# Altium PCB Esperto_Watch_V3.PcbDoc
Units mm, origin at the board's own origin, x right, y up, seen from the top; angles counter-clockwise.
Board outline 30 x 30 mm, 4 copper layers (TOP, POWER, GND, BOTTOM), stack 0.777 mm thick; 69 components, 62 nets, 344 pads, 146 vias.
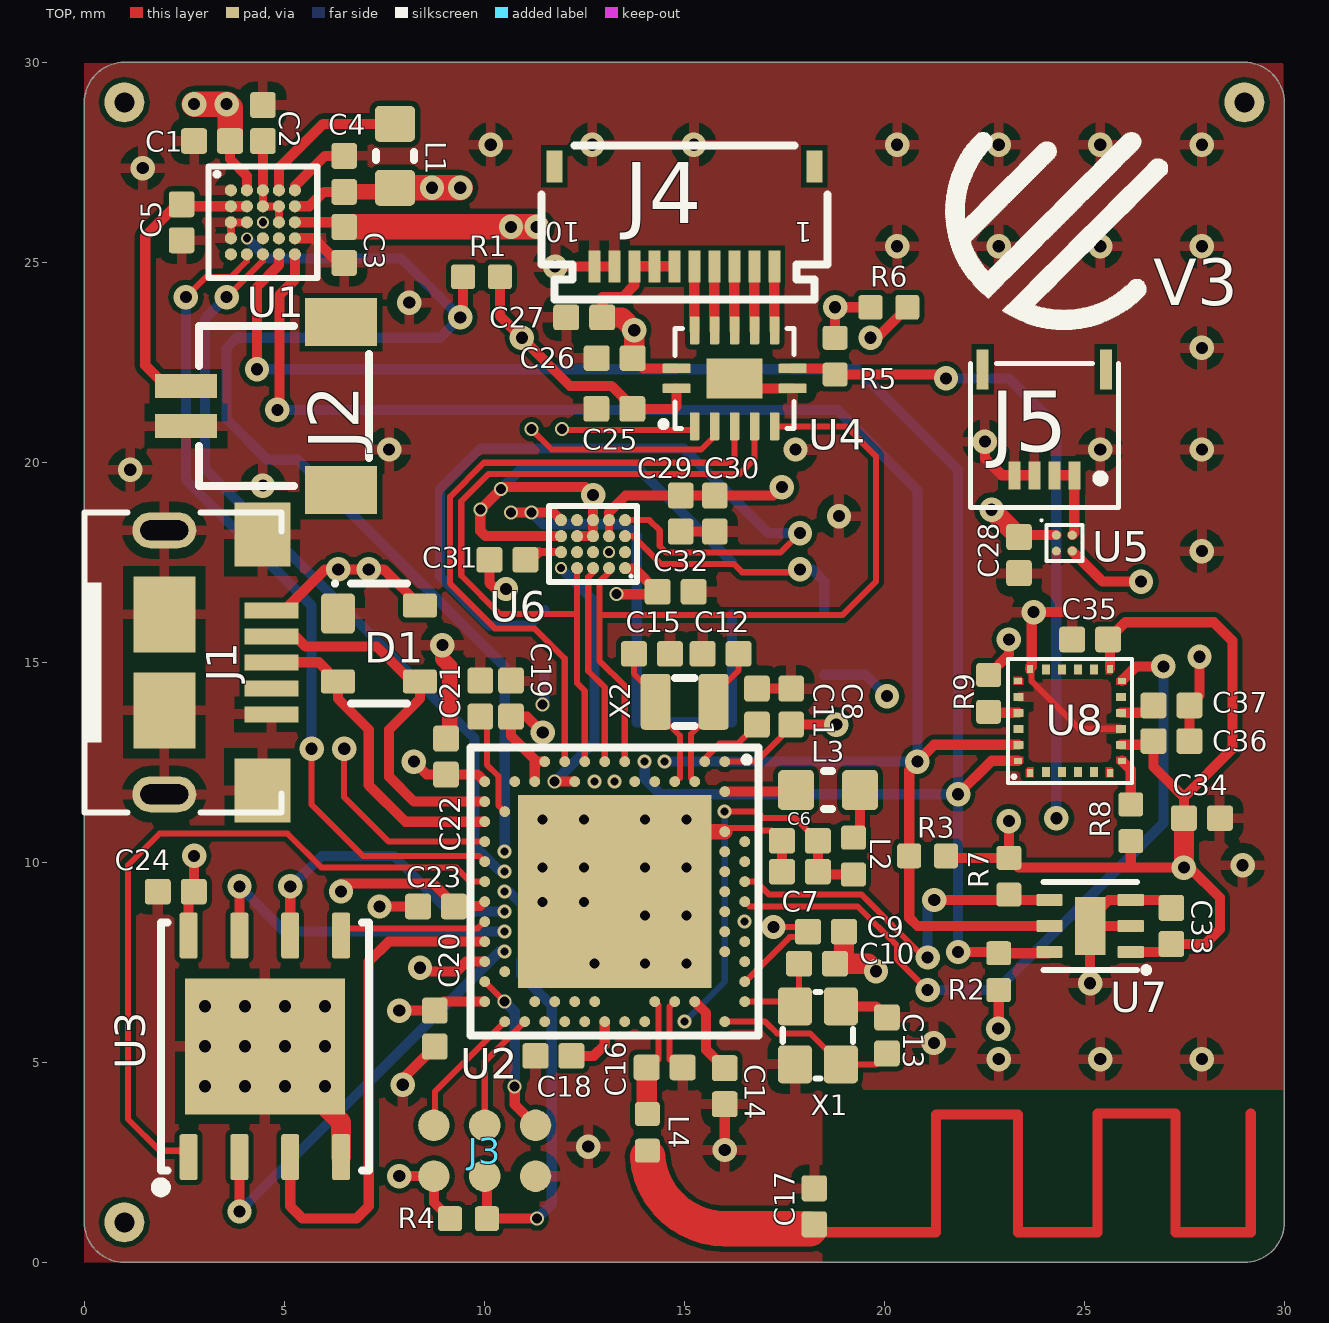
[diagram p0: TOP view]
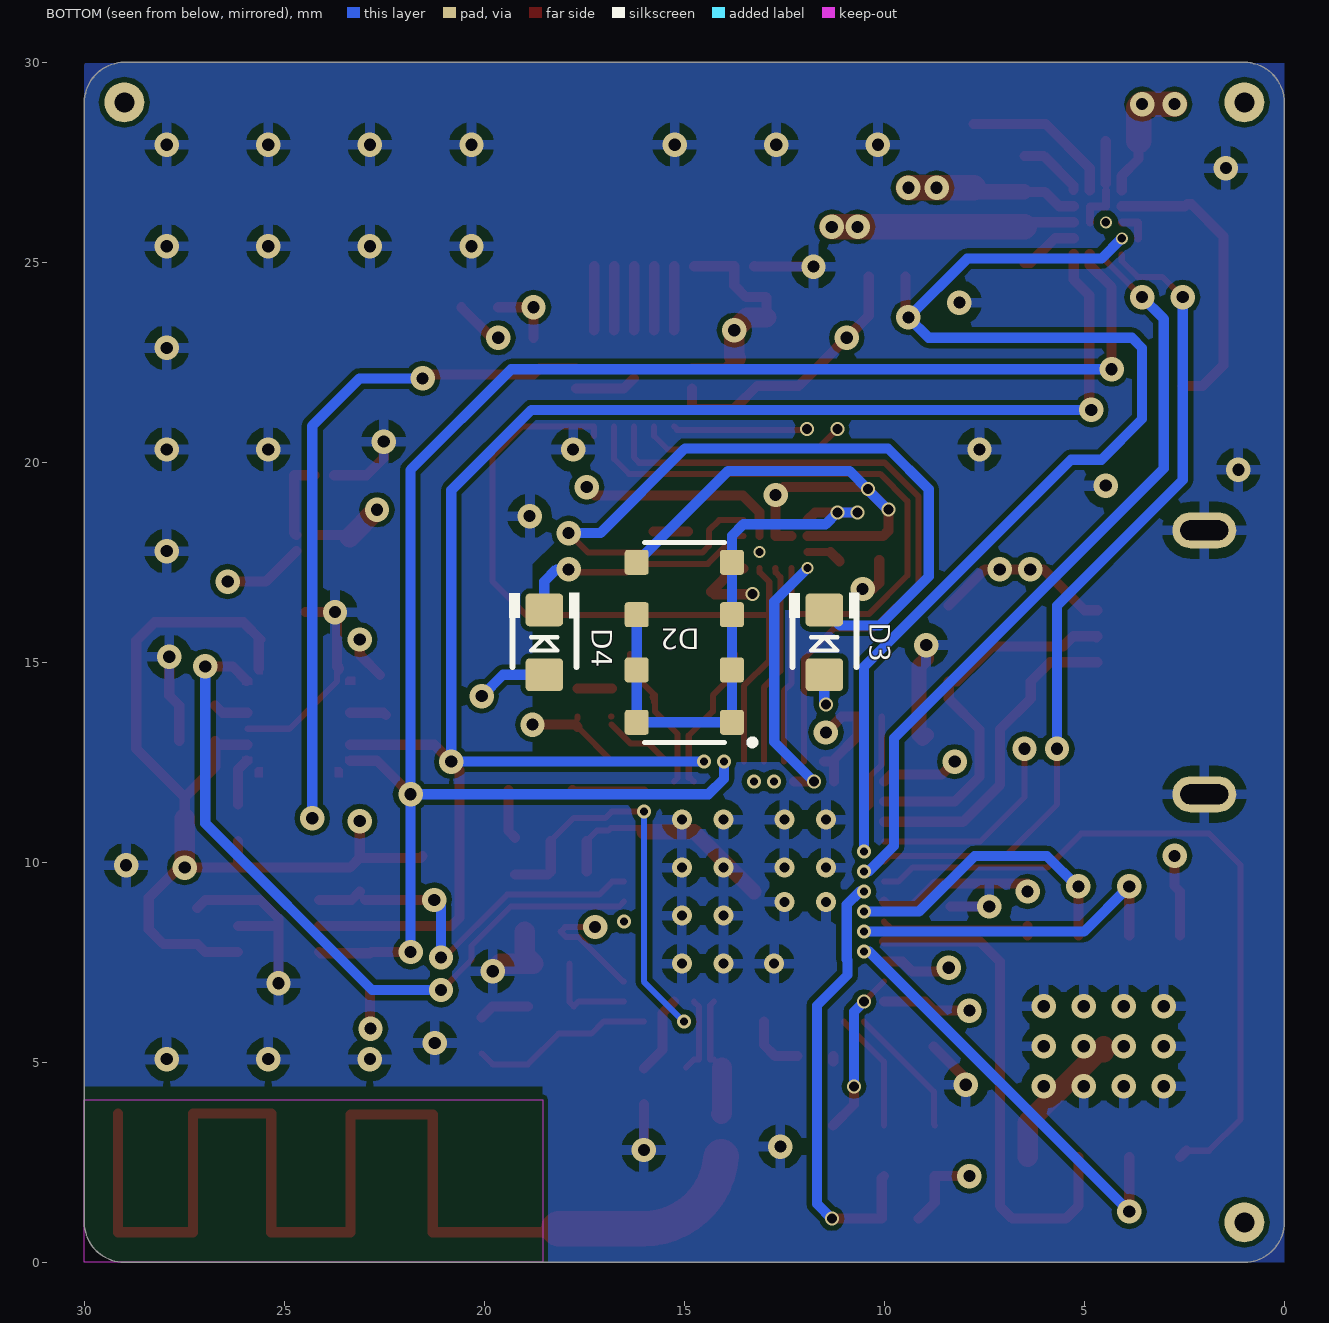
[diagram p1: BOTTOM view, seen from below]
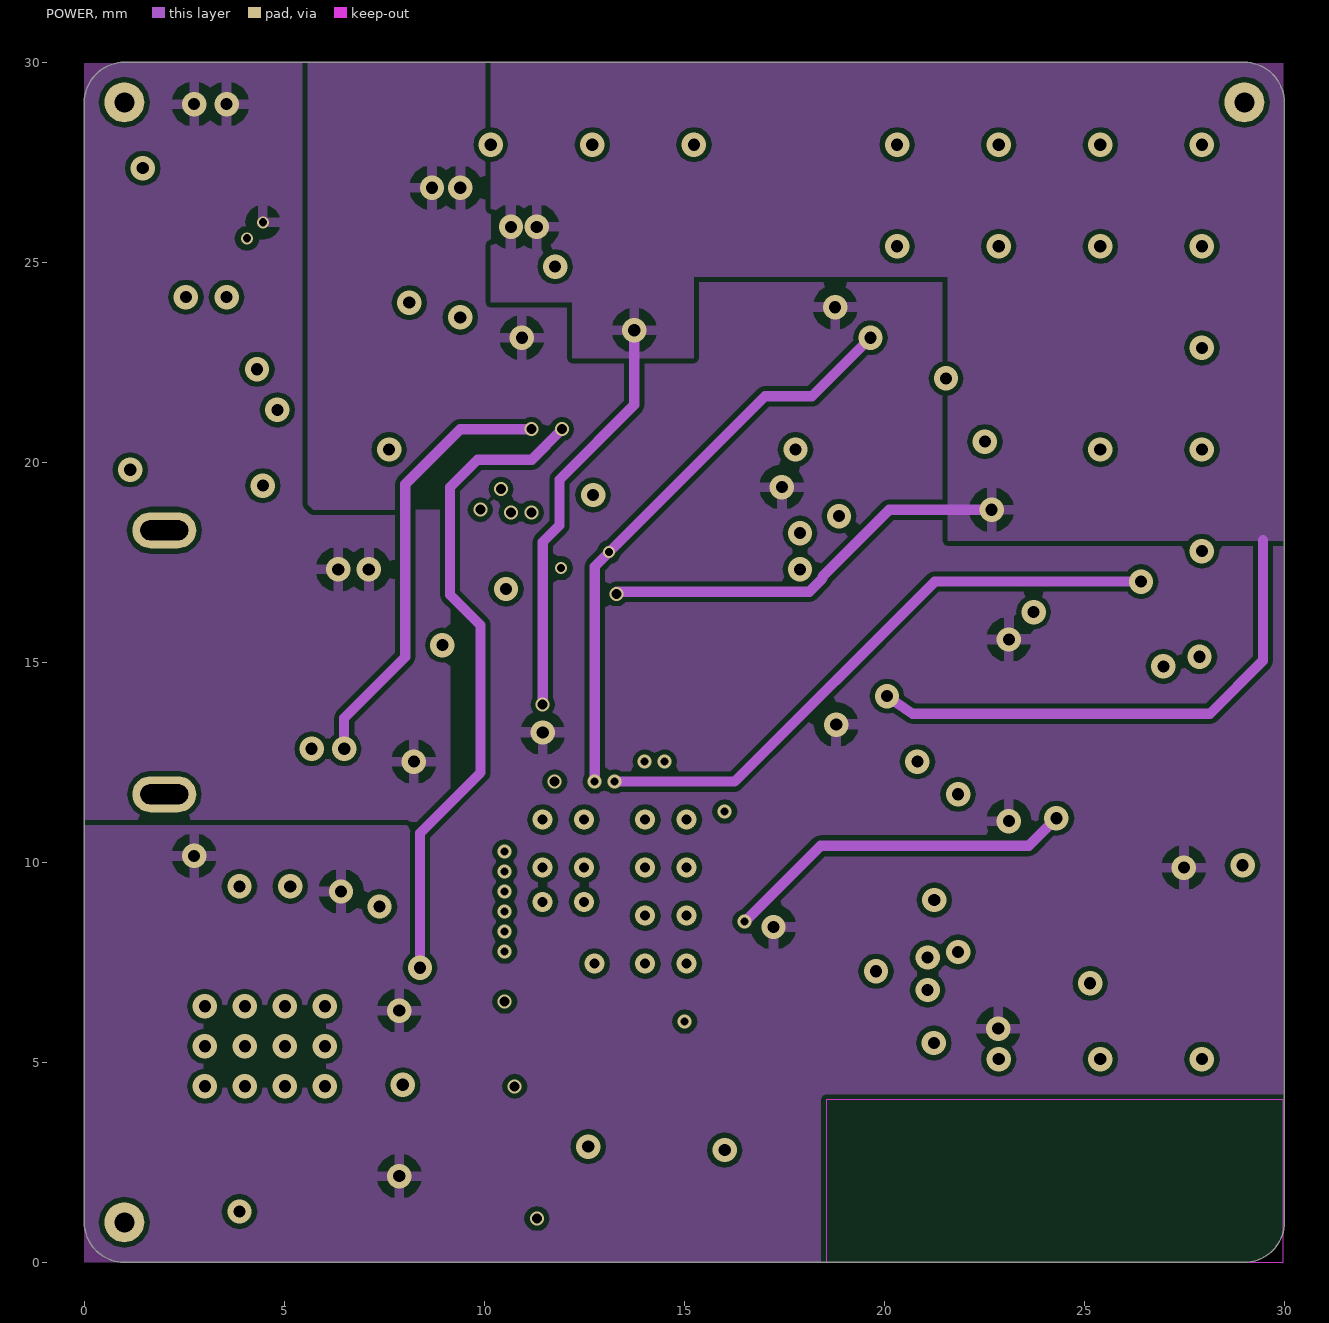
[diagram p2: POWER]
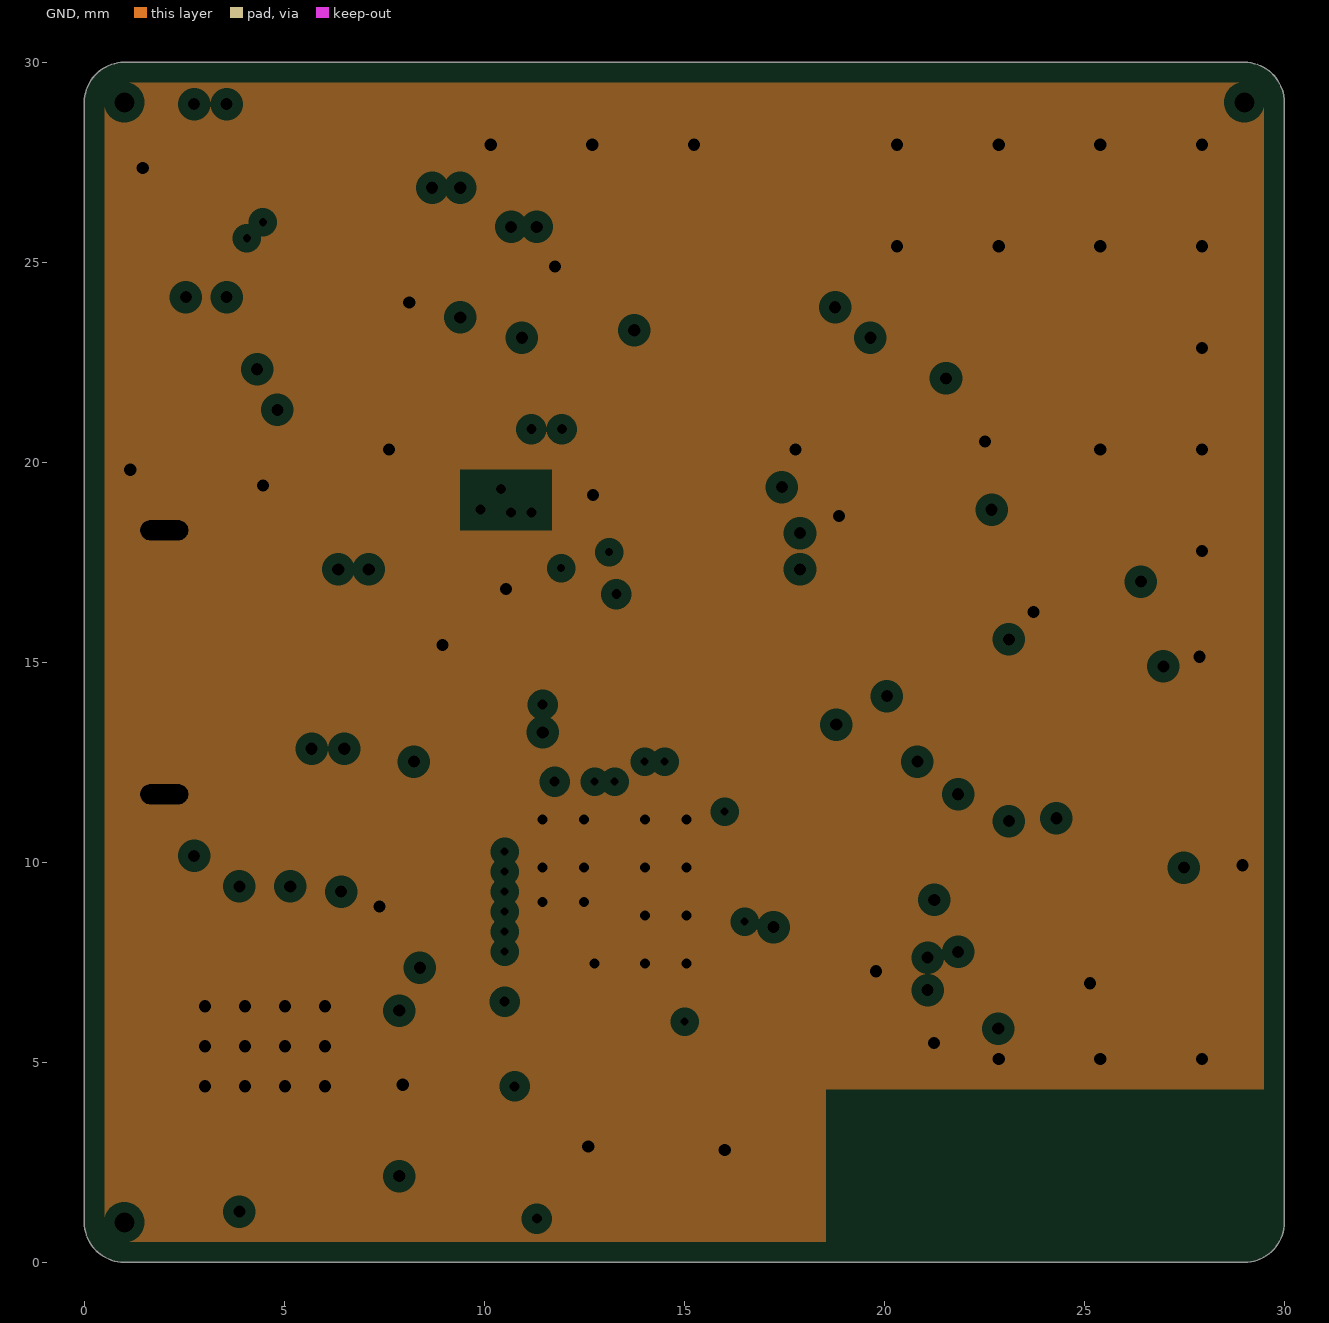
[diagram p3: GND, clearances drawn from the general rule]

## Layer stack, top to bottom
Top Solder: solder mask 0.0102, Solder Resist, Dk 3.5
TOP: signal copper 0.0356
Dielectric 1: core 0.254, FR-4, Dk 4.2
POWER: signal copper 0.0356
Dielectric 4: prepreg 0.127, Dk 4.2
GND: plane copper 0.0356, net GND
Dielectric 2: core 0.254, FR-4, Dk 4.2
BOTTOM: signal copper 0.0356
Bottom Solder: solder mask 0.0102, Solder Resist, Dk 3.5

## Board outline
0,1 0,29 cw(c1,29) 1,30 29,30 cw(c29,29) 30,29 30,1 cw(c29,1) 29,0 1,0 cw(c1,1)

## Design rules (kind name [scope] priority, off if disabled: settings)
Clearance [All] p1: gap=0.127 ignorepadtopadclearanceinfootprint=TRUE except(0: Arc-SMDPad Arc-Text Track-SMDPad Track-Text SMDPad-SMDPad SMDPad-Via SMDPad-Text SMDPad-Hole THPad-Text Via-Text Fill-Text Poly-Text Region-Text Text-Text Text-Hole)
DiffPairsRouting [All] p1: maxlimit=0.254 minlimit=0.254 mostfreqgap=0.254 toplayer_minwidth=0.127 toplayer_maxwidth=0.381 toplayer_prefwidth=0.254 midlayer1_minwidth=0.381 midlayer1_maxwidth=0.381 midlayer1_prefwidth=0.381 bottomlayer_minwidth=0.127 bottomlayer_maxwidth=0.381 bottomlayer_prefwidth=0.254 maxuncoupledlength=12.7
MinimumSolderMaskSliver [All] p1: minsoldermaskwidth=0
PlaneClearance [All] p1: clearance=0.254
PlaneConnect [All] p1: planeconnectstyle=Relief reliefexpansion=0.127 reliefentries=4 reliefconductorwidth=0.127 reliefairgap=0.127
PolygonConnect [All] p1: connectstyle=Relief reliefconductorwidth=0.254 reliefentries=4 polygonreliefangle="90 Angle" airgapwidth=0.254
RoutingVias [All] p1: holewidth=0.381 width=1.27 viastyle="Through Hole" minholewidth=0.203 minwidth=0.254 maxholewidth=0.762 maxwidth=0.635
SilkToSilkClearance [All] p1: silktosilkclearance=0
SilkToSolderMaskClearance [IsPad] p1: minsilkscreentomaskgap=0 clearancetoexposedcopper=TRUE
SolderMaskExpansion [All] p1: expansion=0.102
Width [All] p1: maxlimit=1.27 minlimit=0.152 preferedwidth=0.254 minimp=50.000000 maximp=50.000000 favimp=50.000000
24 further rules are at their usual default settings.

## Classes and differential pairs
differential pair USB_D: +USB_D_P -USB_D_N

## Components (designator, comment, footprint, x,y, rotation, side; value= is the part's Value field where it differs from the comment)
C1 "1uF" CC_1005_0402_N 3.194,28.032 r0 top
C2 "4.7uF" CC_1005_0402_N 4.464,28.482 r270 top
C3 "1uF" CC_1005_0402_N 6.496,25.436 r90 top
C4 "10uF" CC_1005_0402_N 6.496,27.212 r270 top
C5 "1uF" CC_1005_0402_N 2.432,26 r90 top
C6 "1uF" CC_1005_0402_N 17.89,10.537 r0 top
C7 "47nF" CC_1005_0402_N 17.89,9.767 r0 top
C8 "1uF" CC_1005_0402_N 17.671,13.894 r270 top
C9 "100nF" CC_1005_0402_N 18.542,8.267 r180 top
C10 "12pF" CC_1005_0402_N 18.32,7.467 r0 top
C11 "100nF" CC_1005_0402_N 16.816,13.894 r270 top
C12 "12pF" CC_1005_0402_N 15.907,15.212 r0 top
C13 "12pF" CC_1005_0402_N 20.066,5.674 r90 top
C14 "100pF" CC_1005_0402_N 16.01,4.402 r270 top
C15 "12pF" CC_1005_0402_N 14.19,15.212 r180 top
C16 "1pF" CC_1005_0402_N 14.51,4.87 r180 top
C17 "1pF" CC_1005_0402_N 18.25,1.4 r270 top
C18 "820pF" CC_1005_0402_N 11.729,5.161 r0 top
C19 "4.7uF" CC_1005_0402_N 10.668,14.093 r270 top
C20 "100nF" CC_1005_0402_N 8.762,5.842 r90 top
C21 "4.7uF" CC_1005_0402_N 9.899,14.093 r270 top
C22 "4.7uF" CC_1005_0402_N 9.042,12.645 r270 top
C23 "100nF" CC_1005_0402_N 8.794,8.895 r0 top
C24 "100nF" CC_1005_0402_N 2.286,9.266 r0 top
C25 "100nF" CC_1005_0402_N 13.25,21.336 r0 top
C26 "100nF" CC_1005_0402_N 13.26,22.606 r0 top
C27 "1uF" CC_1005_0402_N 12.498,23.622 r0 top
C28 "100nF" CC_1005_0402_N 23.368,17.681 r90 top
C29 "10uF" CC_1005_0402_N 14.91,18.72 r90 top
C30 "100nF" CC_1005_0402_N 15.763,18.72 r90 top
C31 "1uF" CC_1005_0402_N 10.577,17.562 r0 top
C32 "10uF" CC_1005_0402_N 14.783,16.764 r180 top
C33 "1uF" CC_1005_0402_N 27.177,8.408 r270 top
C34 "1uF" CC_1005_0402_N 27.94,11.104 r180 top
C35 "100nF" CC_1005_0402_N 25.146,15.571 r0 top
C36 "100nF" CC_1005_0402_N 27.178,13.031 r180 top
C37 "470nF" CC_1005_0402_N 27.178,13.92 r180 top
D1 "PRTR5V0U2X" PRTR5V0U2X 7.366,15.469 r0 top
D2 "VEMD8080" VEMD8080 15,15.5 r0 bottom
D3 "VLMTG1400" LED_GREEN_0603 11.5,15.5 r270 bottom
D4 "VLMTG1400" LED_GREEN_0603 18.5,15.5 r270 bottom
J1 "10118193-0001LF" CONN_USB_MICRO_B 4.675,15 r0 top locked value=MicroUSB-B
J2 "SM02B-SRSS-TB" SM02B-SRSS-TB 2.541,21.404 r90 top value="HDR-2, 1mm"
J3 "TC2030" CONN_TC2030 10.01,2.789 r0 top
J4 "687110182122" 687110182122 15,26 r180 top
J5 "503480-0400" 503480-0400 24,21 r180 top
L1 "2.2uH" IND_1608_0603_N 7.766,27.662 r270 top
L2 "15nH" RC_1005_0402_N 19.229,10.156 r270 top
L3 "10uH" IND_1608_0603_N 18.594,11.807 r0 top
L4 "3.9nH" RC_1005_0402_N 14.076,3.249 r270 top
R1 "100k" RC_1005_0402_N 9.929,24.638 r0 top
R2 "4.7k" RC_1005_0402_N 22.86,7.267 r270 top
R3 "4.7k" RC_1005_0402_N 21.082,10.16 r0 top
R4 "100k" RC_1005_0402_N 9.604,1.092 r180 top
R5 "100k" RC_1005_0402_N 18.77,22.654 r90 top
R6 "100k" RC_1005_0402_N 20.114,23.876 r180 top
R7 "100k" RC_1005_0402_N 23.114,9.652 r90 top
R8 "4.7k" RC_1005_0402_N 26.162,10.988 r90 top
R9 "4.7k" RC_1005_0402_N 22.606,14.224 r270 top
U1 "BQ25120A" BQ25120A 4.464,26 r0 top value=Value
U2 "nRF52840-QIAA" nRF52840 13.26,9.267 r270 top
U3 "MX25R6435F" MX25R6435FZNIL0 4.513,5.401 r90 top
U4 "FXL5T244BQX" FXL5T244BQX 16.256,22.098 r0 top
U5 "LP5560" LP5560 24.5,17.98 r0 top value=Value
U6 "MAX86140" MAX86140 12.719,17.955 r180 top value=Value
U7 "MAX44009" MAX44009 25.145,8.408 r180 top value=Value
U8 "BHI160" BHI160 24.638,13.539 r90 top
X1 "32MHz" XTAL_32M 18.34,5.674 r90 top
X2 "32.768kHz" XTAL_32K768 15.01,14.014 r0 top

## Footprints (in the part's own frame and the unit in brackets; to place one, negate y for a bottom-side part, rotate by r counter-clockwise, add the part's x,y. Pads: shape width x height; smd on the part's side, far side on the other; paste and mask are expansions set on the pad)
503480-0400 [mm]
  rect 0.3x0.7 smd: 1(-0.75,1.325) 2(-0.25,1.325) 3(0.25,1.325) 4(0.75,1.325)
  rect 0.3x1 smd: S1(-1.54,-1.325) S2(1.54,-1.325)
  silkscreen extent -1.85,-1.48 1.85,2.12, body extent -1.85,-1.9 1.85,1.7, height 1.88
687110182122 [mm] "ZIF Connectors, Horizontal, Dual Contact Back Locking, pitch 0.5mm, 10p"
  rect 0.3x0.8 smd: 1(-2.25,1.1) 2(-1.75,1.1) 3(-1.25,1.1) 4(-0.75,1.1) 5(-0.25,1.1) 6(0.25,1.1) 7(0.75,1.1) 8(1.25,1.1) 9(1.75,1.1) 10(2.25,1.1)
  rect 0.4x0.8 smd: MP1(-3.25,-1.4) MP2(3.25,-1.4)
  silkscreen extent -3.57,-1.92 3.58,1.92, body extent -3.5,-1.85 3.5,1.85, height 0.98
BHI160 [mm]
  rect 0.2x0.15 smd mask+0: 1(-1.3,1) 6(-1.3,-1) 13(1.3,-1) 18(1.3,1)
  rect 0.25x0.2 smd mask+0.05: 2(-1.285,0.6) 3(-1.285,0.2) 4(-1.285,-0.2) 5(-1.285,-0.6) 14(1.285,-0.6) 15(1.285,-0.2) 16(1.285,0.2) 17(1.285,0.6)
  rect 0.15x0.2 smd mask+0: 7(-1,-1.3) 12(1,-1.3) 19(1,1.3) 24(-1,1.3)
  rect 0.2x0.25 smd mask+0.05: 8(-0.6,-1.285) 9(-0.2,-1.285) 10(0.2,-1.285) 11(0.6,-1.285) 20(0.6,1.285) 21(0.2,1.285) 22(-0.2,1.285) 23(-0.6,1.285)
  TOP region: 1.1,-1.41 0.9,-1.41 0.9,-1.16 1.05,-1.16 1.1,-1.21
  TOP region: -1.1,-1.41 -0.9,-1.41 -0.9,-1.16 -1.05,-1.16 -1.1,-1.21
  TOP region: -1.1,1.41 -0.9,1.41 -0.9,1.16 -1.05,1.16 -1.1,1.21
  TOP region: 1.1,1.41 0.9,1.41 0.9,1.16 1.05,1.16 1.1,1.21
  TOP region: 1.41,-1.1 1.41,-0.9 1.16,-0.9 1.16,-1.05 1.21,-1.1
  TOP region: 1.41,1.1 1.41,0.9 1.16,0.9 1.16,1.05 1.21,1.1
  TOP region: -1.41,-1.1 -1.41,-0.9 -1.16,-0.9 -1.16,-1.05 -1.21,-1.1
  TOP region: -1.41,1.1 -1.41,0.9 -1.16,0.9 -1.16,1.05 -1.21,1.1
  silkscreen extent -1.55,-1.55 1.55,1.55, body extent -1.5,-1.5 1.5,1.5, height 1.01
BQ25120A [mil]
  round 12 smd mask+1.57: A1(-31.5,31.5)
  round 12 smd paste+0 mask+1.57: A2(-15.75,31.5) A3(0,31.5) A4(15.75,31.5) A5(31.5,31.5) B1(-31.5,15.75) B2(-15.75,15.75) B3(0,15.75) B4(15.75,15.75) B5(31.5,15.75) C1(-31.5,0) C2(-15.75,0) C3(0,0) C4(15.75,0) C5(31.5,0) D1(-31.5,-15.75) D3(0,-15.75) D4(15.75,-15.75) D5(31.5,-15.75) E1(-31.5,-31.5) E2(-15.75,-31.5) E3(0,-31.5) E4(15.75,-31.5) E5(31.5,-31.5)
  round 5.91 smd paste+0 mask+1.57: D2(-15.75,-15.75)
  silkscreen extent -54,-55 54,55, body extent -48,-50 49,50, height 20
CC_1005_0402_N [mm] "Chip Capacitor, 2-Leads, Body 1.0x0.5mm, IPC Medium Density"
  rrect25% 0.65x0.64 smd paste+0 mask+0.064: 1(-0.45,0) 2(0.45,0)
  body extent -0.55,-0.25 0.55,0.25, height 0.56
CONN_TC2030 [mil]
  round 31 smd paste-3937.01 mask+2.5: 1(-50,-25) 2(-50,25) 3(0,-25) 4(0,25) 5(50,-25) 6(50,25)
CONN_USB_MICRO_B [mm]
  rect 1.35x0.4 smd: 1(0,1.3) 2(0,0.65) 3(0,0) 4(0,-0.65) 5(0,-1.3)
  oval 1.6x0.9 hole 0.5 slot 1.2 at 0 deg: 6(-2.675,-3.3) 6(-2.675,3.3)
  oval 2x1.5 on Top Paste: 6(-2.675,-3.3) 6(-2.675,3.3)
  rect 1.55x1.9 smd: 6(-2.675,-1.2) 6(-2.675,1.2)
  rect 1.4x1.6 smd: 6(-0.225,-3.2) 6(-0.225,3.2)
  silkscreen extent -4.75,-3.75 0.25,3.75, body extent -5.28,-4.1 0.15,4.1, height 2.72
FXL5T244BQX [mm]
  rrect25% 0.7x0.24 smd: 1(-1.45,-0.25) 7(1.45,-0.25) 8(1.45,0.25) 14(-1.45,0.25)
  rrect25% 0.24x0.7 smd: 2(-1,-1.2) 3(-0.5,-1.2) 4(0,-1.2) 5(0.5,-1.2) 6(1,-1.2) 9(1,1.2) 10(0.5,1.2) 11(0,1.2) 12(-0.5,1.2) 13(-1,1.2)
  rect 1.4x1 smd: EPAD(0,0)
  silkscreen extent -1.83,-1.25 1.49,1.25, body extent -1.5,-1.25 1.5,1.25, height 0.75
IND_1608_0603_N [mm] "Chip Resistor, 2-Leads, Body 1.5x0.8mm, IPC Medium Density"
  rrect25% 0.9x1 smd paste+0 mask+0.064: 1(-0.8,0) 2(0.8,0)
  silkscreen extent -0.1,-0.48 0.1,0.48, body extent -0.85,-0.48 0.85,0.48, height 0.55
LED_GREEN_0603 [mm] "LED,Chip;1.60mm L X 0.80mm W X 0.45mm H"
  rrect25% 0.82x0.94 smd mask+0.064: A(0.81,0) K(-0.81,0)
  silkscreen extent -1.24,-0.88 0.61,0.88, body extent -0.8,-0.4 0.8,0.4, height 0.45
LP5560 [mm]
  round 0.229 smd mask+0.051: A1(-0.2,0.2) A2(0.2,0.2) B1(-0.2,-0.2) B2(0.2,-0.2)
  silkscreen extent -0.6,-0.45 0.45,0.6, body extent -0.51,-0.51 0.51,0.51, height 0.6
MAX44009 [mil]
  rrect25% 26x12 smd paste+0 mask+2.5: 1(-40,25.59) 2(-40,0) 3(-40,-25.59) 4(40,-25.59) 5(40,0) 6(40,25.59)
  rect 30x57 smd paste-28 mask+2.5: 7(0,0)
  silkscreen extent -58,-43 46,46, body extent -41,-41 41,41, height 26
MAX86140 [mil]
  round 12 smd paste+0 mask+1.57: A1(-31.5,23.62) A2(-15.75,23.62) A3(0,23.62) A4(15.75,23.62) A5(31.5,23.62) B1(-31.5,7.87) B2(-15.75,7.87) B3(0,7.87) B4(15.75,7.87) B5(31.5,7.87) C1(-31.5,-7.87) C2(-15.75,-7.87) C3(0,-7.87) C4(15.75,-7.87) C5(31.5,-7.87) D1(-31.5,-23.62) D2(-15.75,-23.62) D3(0,-23.62) D4(15.75,-23.62) D5(31.5,-23.62)
  silkscreen extent -43,-37 43,37, body extent -41,-36 41,37, height 20
MX25R6435FZNIL0 [mm]
  rrect25% 1.15x0.45 smd: 1(-2.77,1.905) 2(-2.77,0.635) 3(-2.77,-0.635) 4(-2.77,-1.905) 5(2.77,-1.905) 6(2.77,-0.635) 7(2.77,0.635) 8(2.77,1.905)
  rect 3.4x4 smd paste-1.7: 4(0,0)
  silkscreen extent -3.65,-2.6 3.1,2.72, body extent -3.05,-2.55 3.05,2.55, height 0.8
nRF52840 [mm]
  rect 4.83x4.83 smd mask+0.05: 74(0,0)
  round 0.275 smd paste+0.012 mask+0.05: A8(-1.25,3.25) A10(-0.75,3.25) A12(-0.25,3.25) A14(0.25,3.25) A16(0.75,3.25) A18(1.25,3.25) A20(1.75,3.25) A22(2.25,3.25) A23(2.75,3.25) AA24(3.25,-2.25) AB2(-2.75,-2.5) AC5(-2,-2.75) AC9(-1,-2.75) AC11(-0.5,-2.75) AC13(0,-2.75) AC15(0.5,-2.75) AC17(1,-2.75) AC19(1.5,-2.75) AC21(2,-2.75) AC24(3.25,-2.75) AD2(-2.75,-3.25) AD4(-2.25,-3.25) AD6(-1.75,-3.25) AD8(-1.25,-3.25) AD10(-0.75,-3.25) AD12(-0.25,-3.25) AD14(0.25,-3.25) AD16(0.75,-3.25) AD18(1.25,-3.25) AD20(1.75,-3.25) AD22(2.25,-3.25) AD23(2.75,-3.25) B1(-3.25,2.75) B3(-2.5,2.75) B5(-2,2.75) B7(-1.5,2.75) B9(-1,2.75) B11(-0.5,2.75) B13(0,2.75) B15(0.5,2.75) B17(1,2.75) B19(1.5,2.75) B24(3.25,2.75) C1(-3.25,2.25) D2(-2.75,2) D23(2.75,2) E24(3.25,1.75) F2(-2.75,1.5) F23(2.75,1.5) G1(-3.25,1.25) H2(-2.75,1) H23(2.75,1) J1(-3.25,0.75) J24(3.25,0.75) K2(-2.75,0.5) L1(-3.25,0.25) L24(3.25,0.25) M2(-2.75,0) N1(-3.25,-0.25) N24(3.25,-0.25) P2(-2.75,-0.5) P23(2.75,-0.5) R1(-3.25,-0.75) R24(3.25,-0.75) T2(-2.75,-1) T23(2.75,-1) U1(-3.25,-1.25) U24(3.25,-1.25) V23(2.75,-1.5) W1(-3.25,-1.75) W24(3.25,-1.75) Y2(-2.75,-2) Y23(2.75,-2)
  silkscreen extent -3.6,-3.6 3.6,3.6, body extent -3.55,-3.55 3.55,3.55, height 0.85
PRTR5V0U2X [mm]
  rrect25% 0.85x1 smd: 1(-1.025,0.75)
  rrect25% 0.85x0.6 smd: 2(-1.025,-0.95) 3(1.025,-0.95) 4(1.025,0.95)
  silkscreen extent -1.15,-1.5 0.7,1.55, body extent -1.21,-1.46 1.21,1.46, height 1
RC_1005_0402_N [mm] "Chip Resistor, 2-Leads, Body 1.0x0.5mm, IPC Medium Density"
  rrect25% 0.6x0.62 smd paste+0 mask+0.064: 1(-0.46,0) 2(0.46,0)
  body extent -0.55,-0.25 0.55,0.25, height 0.4
SM02B-SRSS-TB [mm]
  rect 1.2x1.8 smd: 0(-2.1,-3.875) 0(2.1,-3.875)
  rect 0.6x1.55 smd: 1(-0.5,0) 2(0.5,0)
  silkscreen extent -2,-4.57 2,-0.33, body extent -1.99,-4.58 1.99,0.41, height 3
VEMD8080 [mm]
  rrect25% 0.6x0.625 smd mask+0.064: A(1.19,-2) K(-1.19,-2) K(-1.19,-0.69) K(-1.19,0.69) K(-1.19,2) K(1.19,-0.69) K(1.19,0.69) K(1.19,2)
  silkscreen extent -1.75,-2.5 1,2.55, body extent -1.25,-2.4 1.25,2.4, height 0.48
XTAL_32K768 [mm]
  rrect25% 0.75x1.4 smd: 1(-0.725,0) 2(0.725,0)
  silkscreen extent -0.24,-0.6 0.24,0.6, body extent -1,-0.61 1,0.61, height 0.6
XTAL_32M [mm]
  rrect25% 0.95x0.85 smd: 1(-0.725,-0.575) 2(0.725,-0.575) 3(0.725,0.575) 4(-0.725,0.575)
  silkscreen extent -1.08,-0.88 1.08,0.88, body extent -1.05,-0.85 1.05,0.85, height 0.56

## Part data
C1 C2 C3 C4 C5 C6 C7 C8 C9 C10 C11 C12 C13 C14 C15 C16 C17 C18 C19 C20 C21 C22 C23 C24 C25 C26 C27 C28 C29 C30 C31 C32 C33 C34 C35 C36 C37: library part Capacitor, "Capacitor"
D1: "Ultra low capacitance double rail-to-rail ESD protection diode", 2nd source part number=152-4157, Manufacturer=NXP, Supplier part number=568-4140-1-ND, 2nd source Supplier=Farnell, Artikkelnr Noca=10069015, Artikkelnr Simpro=N.A., Datasheet=http://www.farnell.com/datasheets/109718.pdf, Footprint Doc=SOT-143B, LatestRevisionDate=2012-06-11, Manufacturer Part Number=PRTR5V0U2X, Part Number=PRTR5V0U2X, Published=2012-06-11, Publisher="Nordic Semiconductor", Supplier=Digi-Key
D2: library part Photodiode, "Photodiode"
D3 D4: library part LED, "Single LED"
J1: "MicroUSB-B-SMT", 2nd source part number=609-4616-1-ND, Manufacturer="Allen Creations Corp.", Manufacturer Part Number=AJU55-BS2111-L, Part Number=USB-Micro-B-RA-SMD-PiP, Part number IPS=00000007790, 2nd source Supplier=Digi-Key, Artikkelnr Noca=55029020, Artikkelnr Simpro=N.A., Datasheet="\\hizz\pro\app9717\Datasheet\connectores\Allen Creations Corp\AJU-211.pdf", Footprint Doc=USB-Micro-B-RA-SMD-PiP, LatestRevisionDate=2016-04-21, Pin Count=5, Published=2014-10-07, Publisher="Nordic Semiconductor", Supplier=Cabcon, Supplier part number=AJU55-BS2111-L
J2: "1.0mm pitch connector side entry SMD", Manufacturer=JST, Manufacturer Part Number=SM02B-SRSS-TB(LF)(SN), Part number IPS=00000007791, Supplier part number=455-1802-1-ND, Artikkelnr Noca=55010030, Artikkelnr Simpro=N.A., Datasheet=http://www.jst-mfg.com/product/pdf/eng/eSH.pdf, Footprint Doc=SM02B-SRSS-TB, LatestRevisionDate=2016-06-20, Note="JST, Header", Part Number=SM02B-SRSS-TB, Pin Count=2, Published=2016-06-20, Publisher="Nordic Semiconductor", Supplier=Digi-Key
J4: "SMT ZIF Connectors WR-FPC, Horizontal, Back Locking Dual Contact, pitch 0.5 mm, 10 pins", Contact Resistance="30 mOhm", Operating Temperature="-55 to 85 degC", Rated Current="0.5 A", Withstanding Voltage="250 VAC", Working Voltage="50 VAC", ComponentLink1Description=Manufacturer, ComponentLink1URL=http://www.we-online.de, ComponentLink2Description=Datasheet, ComponentLink2URL=https://katalog.we-online.de/em/datasheet/687110182122.pdf, Contact Design="Back Locking Dual Contact", Mounting Technology=SMT, Orientation=Horizontal, Packaging="Tape and Reel", Part Number=687110182122, Pin Number=10, Pitch="0.5 mm", Published Date="August 2018", Publisher="Wurth Elektronik"
J5: "0.50mm Pitch Easy-On", Package=None, Digi-Key_Part_Number=WM1386CT-ND, Digi-Key_Purchase_URL=https://www.digikey.ca/product-detail/en/molex/5034800400/WM1386CT-ND/2356640?utm_source=snapeda&utm_medium=aggregator&utm_campaign=symbol, MF=Molex, MP=5034800400, SnapEDA_Link=https://www.snapeda.com/parts/5034800400/Molex/view-part/?ref=snap
L1 L3: library part Inductor_0603, "Inductor"
L2 L4: library part Inductor_0402, "Inductor"
R1 R2 R3 R4 R5 R6 R7 R8 R9: library part Resistor, "Resistor"
U1: "Battery Charge Management Solution", Alternate_PartNumber=BQ25120YFPT, Manufacturer="Texas Instruments", Manufacturer_Part_Number=BQ25120YFPR, Built_By=Texas_Instrument_Team, CompType=IC, Copyright="Copyright (C) 2018 Accelerated Designs. All rights reserved", MountType=SMT, PackageReference=YFP0025BABD, PartNumber=BQ25120YFPR, RefDes=RefDes, RoHS=Y, Type=DEV, Vendor="Texas Instruments"
U2: "Multi-protocol Bluetooth Low Energy, IEEE 802.15.4, ANT and 2.4GHz proprietary system-on-chip", Manufacturer="Nordic Semiconductor", Manufacturer Part Number=nRF52840-QIAAC0, Part number IPS=N.A., Artikkelnr Noca=N.A., Artikkelnr Simpro=N.A., ComponentLink1Description=Datasheet, ComponentLink2Description="Supplier link", Footprint Doc=AQFN-73, LatestRevisionDate=2017-12-06, Part Number=nRF52840-QIAAC0, Pin Count=73, Published=2017-08-21, Publisher="Nordic Semiconductor", Supplier="Nordic Semiconductor", Supplier part number=nRF52840-QIAAC0
U3: "Ultra low power, 64M-bit, serial multi I/O flash memory", 2nd source part number=MX25R6435FZNIL0, Manufacturer=Macronix, 2nd source Supplier=Arrow, Artikkelnr Noca=15020015, Artikkelnr Simpro=N.A., Datasheet=http://www.macronix.com/Lists/Datasheet/Attachments/3881/MX25R6435F,%20Wide%20Range,%2064Mb,%20v1.3.pdf, Footprint Doc=WSON-8, LatestRevisionDate=2016-06-29, Manufacturer Part Number=MX25R6435FZNIL0, Part Number=MX25R6435FZNIL0, Pin Count=8, Published=2016-06-29, Publisher="Nordic Semiconductor", Supplier=Future, Supplier part number=MX25R6435FZNIL0
U4: "Voltage Level Translator Unidirectional 1 Circuit 5 Channel", Package="DQFN-20 ON Semiconductor", Digi-Key_Part_Number=FXLA108BQXCT-ND, Digi-Key_Purchase_URL=https://www.digikey.ca/product-detail/en/on-semiconductor/FXLA108BQX/FXLA108BQXCT-ND/2051660?utm_source=snapeda&utm_medium=aggregator&utm_campaign=symbol, MF="ON Semiconductor", MP=FXLA108BQX, SnapEDA_Link=https://www.snapeda.com/parts/FXLA108BQX/ON%20Semiconductor/view-part/?ref=snap
U5: "Programmable Single-LED Driver", Manufacturer_Part_Number=LP5522TM/NOPB, Built_By=EMA_UL_Team, Copyright="Copyright (C) 2018 Accelerated Designs. All rights reserved", RefDes=RefDes, Type=DEV, Vendor="Texas Instruments"
U6: "Optical Pulse Oximeter and / Heart-Rate Sensor", Manufacturer_Part_Number=MAX86140ENP+, Built_By=EMA_UL_Team, Copyright="Copyright (C) 2018 Accelerated Designs. All rights reserved", RefDes=RefDes, Type=DEV, Vendor="Maxim Integrated Products"
U7: "Ambient Light Sensor", Manufacturer_Part_Number=MAX44009EDT+T, Built_By=EMA_UL_Team, Copyright="Copyright (C) 2018 Accelerated Designs. All rights reserved", RefDes=RefDes, Type=DEV, Vendor="Maxim Integrated Products"
U8: "Ultra low-power sensor hub incl. integrated IMU", Manufacturer_Part_Number=BHI160, Part_Type=IC, Provided By=BOSCH
X1: "XTAL SMD 2016, 32MHz, Cl=8pF, Tol: ±10ppm, Stab: ±10ppm", Manufacturer=Murata, Manufacturer Part Number=XRCGB32M000F1H01R0, Part Number=XTAL_SMD2016_32MHz_8pF_Murata, Part number IPS=80000001424, Artikkelnr Noca=N.A., Artikkelnr Simpro=N.A., ComponentLink1Description=Datasheet, ComponentLink2Description="Supplier link", Footprint Doc=XTAL_2016, HelpURL=http://www.murata.com/en-global/products/productdetail.aspx?cate=cgsubCrystalUnits&partno=XRCGB32M000F1H01R0, LatestRevisionDate=2017-11-09, Note="XTAL SMD 32.000MHz", Pin Count=4, Published=2016-10-26, Publisher="Nordic Semiconductor"
X2: "XTAL SMD 2012, 32.768kHz, 9pF, ±20ppm", Manufacturer=Seiko, Manufacturer Part Number=SC20S-9.0PF20PPM, Part Number=XTAL_SMD2012_32.768kHz_9pF_Seiko, Part number IPS=80000001425, Artikkelnr Noca=N.A., Artikkelnr Simpro=N.A., ComponentLink1Description=Datasheet, ComponentLink2Description="Supplier link", Footprint Doc=XTAL_2012, HelpURL=http://www.sii.co.jp/en/quartz/files/2013/03/file_PRODUCT_MASTER_50811_GRAPHIC03.pdf, LatestRevisionDate=2017-11-09, Note="XTAL SMD 32.768kHz", Pin Count=2, Published=2015-10-15, Publisher="Nordic Semiconductor"

## Free pads (board coordinates)
  round 1 hole 0.5 unplated: 2(1,1) 2(1,29) 2(29,29)

## Via types
v1: diameter 0.61, hole 0.305, TOP to BOTTOM, 102 vias
v2: diameter 0.5, hole 0.25, TOP to BOTTOM, 15 vias
v3: diameter 0.35, hole 0.2, TOP to BOTTOM, 13 vias
v4: diameter 0.35, hole 0.25, TOP to BOTTOM, 12 vias
v5: diameter 0.3, hole 0.204, TOP to BOTTOM, 4 vias

## Nets (pads, with @x,y where several pads share a name; then routed paths per layer and width w, separated by ;. In a path a pad name is that pad's centre, name@x,y a point inside that pad or via, vN(x,y) a via of type N, cw(c..) or ccw(c..) an arc to the next point about the centre after c; other vN are vias at no path point)
+1V8: C4.2 C8.2 C9.2 C19.2 C20.2 C23.2 C24.2 C25.2 C29.2 C30.2 C33.2 C34.2 C35.2 C36.2 J3.1 L1.2 R1.2 R2.2 R3.2 R4.2 R5.2 R6.2 R7.2 R8.1 R9.1 U1.B5 U2.A22 U2.AD14 U2.AD23 U2.B1 U2.W1 U2.Y2 U3.8 U4.1 U6.C2 U6.D2 U7.1 U8.8 U8.13 | length 65.2
  TOP w0.152: U2.B1 16.802,12.517 C8.2@17.671,13.386 ; U2.A22 16.526,7.017 17.637,8.128 17.953,8.128 C9.2 17.977,8.382 v1(17.23,8.382) v1@17.365,8.517 ; C8.2@17.671,13.6 C8.2@17.671,13.643
  TOP w0.2: U6.C2 U6.D2
  TOP w0.254: U3.8 2.608,9.27 2.744,9.406 v1(2.744,10.16) ; U1.B5 5.626,26.4 5.988,26.762 C4.2 ; v1(6.418,9.27) 6.418,9.469 8.727,9.469 9.244,8.952 C23.2@9.244,8.908 ; L1.2@7.666,26.762 L1.2 ; v1(7.874,2.154) J3.1 8.74,1.496 R4.2 ; v1(7.874,6.292) C20.2 8.987,6.517 U2.AD23 ; C23.2 C23.2@9.244,8.908 ; U2.AD14 9.902,8.908 C23.2@9.244,8.908 ; R1.2 10.389,23.664 v1(10.939,23.114) 12.143,21.91 13.183,21.91 13.7,21.393 C25.2 14.75,21.336 14.806,21.392 U4.1 ; U2.Y2 11.26,12.569 ; v1(11.46,13.246) 11.063,13.643 C19.2 10.668,13.161 11.26,12.569 ; U2.W1 11.312,12.517 11.26,12.569 ; U6.D2 13.119,18.751 13.537,19.17 C29.2 C30.2 17.23,19.17 v1(17.44,19.38) ; C8.2@17.671,13.386 17.729,13.444 v1(18.796,13.444) ; R5.2 v1(18.77,23.876) R6.2 ; R3.2 21.59,10.112 R7.2 ; R9.1 23.114,15.192 v1(23.114,15.571) ; v1(22.846,5.842) 22.86,5.856 R2.2 ; v1(23.114,11.03) v1(23.114,11.03) R7.2 ; U8.13 25.638,15.529 C35.2 26.027,16.002 28.238,16.002 28.702,15.538 28.702,12.838 27.49,11.626 ; U8.8 26.636,12.939 C36.2 26.728,12.388 27.49,11.626 ; U7.1 26.977,7.758 C33.2 28.024,7.958 28.39,8.324 28.39,9.115 27.638,9.867 v1(27.49,9.867) 26.162,9.867 ; R8.1 26.162,9.867 ; C34.2 27.49,11.626 ; R7.2 23.359,9.867 26.162,9.867
  TOP w0.381: C4.2 L1.2@7.666,26.762
  TOP w0.508: v1(27.49,9.867) C34.2
  TOP w0.635: L1.2 v1(8.693,26.862) v1(9.398,26.862)
+3V3: C3.2 C26.2 C27.2 C28.2 C32.2 D3.A D4.A J4.6 J4.7 J4.8 U1.C5 U4.14 U5.A1 U6.A1 | length 52.2
  TOP w0.254: U1.C5 6.382,26 C3.2 ; C27.2 12.948,24.124 12.954,24.13 13.456,24.13 13.75,24.424 J4.8 J4.7 J4.6 ; v4(13.3,16.704) 14.239,16.704 C32.2@14.316,16.781 ; U6.A1@13.525,17.348 13.749,17.348 C32.2@14.316,16.781 ; C26.2 13.968,22.348 U4.14 ; C32.2 C32.2@14.316,16.781 ; C28.2 23.417,18.18 U5.A1
  TOP w0.508: C27.2 13.432,23.622 v1(13.75,23.304) 13.75,22.646 C26.2 ; v1@22.684,18.814 C28.2
  TOP w0.635: C3.2 v1(10.668,25.886) v1(11.312,25.886)
  POWER w0.254: v4(11.46,13.941) 11.46,18.009 11.878,18.427 11.878,19.565 13.75,21.437 v1(13.75,23.304) ; v4(13.3,16.704) 13.3,16.764 18.123,16.764 18.451,17.091 18.451,17.141 20.124,18.814 v1(22.683,18.814) ; v1(20.066,14.155) 20.707,13.716 28.14,13.716 29.464,15.04 29.464,18.062
  BOTTOM w0.254: v4(11.46,13.941) 11.5,13.981 D3.A ; D4.A 19.531,14.69 v1(20.066,14.155)
+V_UNREG: C2.2 U1.A3 U1.B3 U1.B4 U1.C4 | length 2.3
  TOP w0.2: U1.A3 U1.B3 U1.B4 U1.C4
  TOP w0.254: 4.464,26.975 C2.2
+VUSB: C1.2 C22.2 D1.4 J1.1 U1.A2 U1.C3 U2.AD2 | length 9.7
  TOP w0.254: C1.2 3.644,27.582 4.064,27.162 U1.A2 ; J1.1 4.997,16.3 6.02,17.323 7.487,17.323 D1.4 ; v1(8.24,12.517) 8.562,12.195 C22.2 9.832,12.195 U2.AD2
  TOP w0.635: v1(2.744,28.956) v1(3.556,28.956) 3.644,28.868 C1.2
  other v1: 6.35,17.323 7.112,17.323
  other v5: 4.464,26
DISP_ON_OFF: U2.AD20 U4.2 | length 21.5
  TOP w0.152: v4(11.938,20.828) 11.953,20.813 15.186,20.813 15.186,20.828 U4.2
  TOP w0.254: v1(8.391,7.366) 8.49,7.267 9.299,7.267 9.549,7.517 U2.AD20
  POWER w0.254: v1(8.391,7.366) 8.391,10.727 9.906,12.242 9.906,15.926 9.144,16.688 9.144,19.38 9.83,20.066 11.185,20.066 11.938,20.819 v4(11.938,20.828)
EXTCOMIN: U2.AD8 U4.3 | length 21.3
  TOP w0.152: v1(6.496,12.838) 6.496,11.629 7.608,10.517 U2.AD8 ; v4(11.176,20.828) 11.684,20.32 15.418,20.32 15.756,20.658 U4.3
  POWER w0.254: v1(6.496,12.838) 6.496,13.608 8.022,15.134 8.022,19.452 9.398,20.828 v4(11.176,20.828)
GND: C1.1 C2.1 C3.1 C4.1 C5.1 C6.1 C7.1 C8.1 C9.1 C10.2 C11.1 C12.1 C13.2 C14.2 C15.1 C16.1 C17.1 C18.1 C19.1 C20.1 C21.1 C22.1 C23.1 C24.1 C25.1 C26.1 C27.1 C28.1 C29.1 C30.1 C31.1 C32.1 C33.1 C34.1 C35.1 C36.1 C37.1 D1.1 D2.A J1.5 J1.6@2,11.7 J1.6@2,13.8 J1.6@2,16.2 J1.6@2,18.3 J1.6@4.45,11.8 J1.6@4.45,18.2 J2.1 J3.5 J4.9 J4.10 J5.3 J5.4 U1.A1 U1.A5 U1.C1 U1.C2 U1.D1 U1.D5 U2.74 U2.B7 U2.F23 U3.4 U4.7 U4.EPAD U5.B1 U6.C3 U6.C4 U6.C5 U6.D3 U7.2 U7.3 U7.7 U8.9 U8.18 U8.20 X1.2 X1.4 | length 59.6
  TOP w0.152: U2.F23 14.632,6.389 14.632,5.07 14.76,5.07 C16.1 ; U2.B7 16.101,10.858 16.83,10.858 16.897,10.791 17.186,10.791 C6.1 ; U8.18 23.681,14.796 23.681,14.528 24.87,13.339 U8.9
  TOP w0.2: U1.D1 U1.C1 U1.C2
  TOP w0.254: U1.D5 5.734,25.6 6.348,24.986 C3.1 ; U1.A5@5.27,26.806 5.27,26.914 6.018,27.662 C4.1 ; v1(7.378,8.895) C23.1 ; v1(7.962,4.438) 7.962,4.592 C20.1 ; C31.1 10.127,16.991 10.284,16.834 v1(10.542,16.834) ; C18.1@11.279,5.026 C18.1 ; v1(11.77,24.892) 13.242,24.892 J4.9 ; U6.C5 10.032,18.155 9.899,18.288 9.899,18.799 v4(9.899,18.814) 10.389,19.304 10.465,19.38 12.522,19.38 v1(12.719,19.183) U6.D3 U6.C3 U6.C4 ; C29.1 C30.1 ; C14.2 v1(16.01,2.807) v1@16.027,2.789 ; U4.EPAD 16.506,21.848 U4.7 ; C11.1 C8.1 ; C7.1 C6.1 ; X1.2 19.791,6.399 C13.2 ; v1(22.515,20.517) 22.515,20.106 22.946,19.675 J5.4 J5.3 ; U8.18 23.684,14.885 23.684,16.208 v1(23.732,16.256) 24.465,16.256 ; v1(25.145,6.975) U7.7 ; U7.2 U7.7 ; C33.1 26.977,9.058 U7.3 25.61,9.058 25.145,8.594 U7.7 ; C36.1 C37.1 27.878,14.17 v1(27.878,15.137)
  TOP w0.381: v1(8.953,15.43) 8.953,15.087 9.134,14.906 9.134,13.185 8.953,13.185 C22.1 ; U2.74 14.76,10.767 U2.B7
  TOP w0.508: U3.4@4.513,5.252 4.513,5.401 6.418,3.496 U3.4@6.418,2.631 ; C9.1 18.992,7.689 C10.2 19.601,7.467 v1(19.791,7.277)
  BOTTOM w0.254: v4@9.899,18.799 10.389,19.289 10.389,19.304 10.872,19.787 13.903,19.787 D2.A
  other v1: 12.598,2.894 3.013,4.401 4.013,4.401 5.013,4.401 6.013,4.401 22.86,5.08 25.4,5.08 27.94,5.08 3.013,5.401 4.013,5.401 5.013,5.401 6.013,5.401 21.238,5.483 3.013,6.401 4.013,6.401 5.013,6.401 6.013,6.401 28.956,9.925 27.94,17.78 18.867,18.655 4.464,19.418 1.148,19.812 7.62,20.32 17.78,20.32 25.4,20.32 27.94,20.32 27.94,22.86 8.124,23.992 20.32,25.4 22.86,25.4 25.4,25.4 27.94,25.4 1.461,27.355 10.16,27.94 12.7,27.94 15.24,27.94 20.32,27.94 22.86,27.94 25.4,27.94 27.94,27.94
  other v2: 12.752,7.467 14.022,7.467 15.06,7.467 14.022,8.667 15.06,8.667 11.46,9.013 12.498,9.013 11.46,9.867 12.498,9.867 14.022,9.867 15.06,9.867 11.46,11.067 12.498,11.067 14.022,11.067 15.06,11.067
  other v4: 10.414,19.329
HR_INT: R6.1 U2.P2 U6.B2 | length 15.9
  TOP w0.254: v1(19.654,23.114) 19.817,23.114 20.574,23.871 R6.1
  POWER w0.254: v3(12.76,12.017) 12.76,17.396 v5(13.119,17.755) 17.018,21.654 18.194,21.654 v1(19.654,23.114)
IMU_INT: U2.A14 U8.12 | length 18.4
  TOP w0.152: U2.A14 16.632,8.895 19.334,8.895 20.32,7.909 20.32,7.569 v1(21.082,6.807)
  TOP w0.254: U8.12 26.297,14.898 v1(26.977,14.898)
  BOTTOM w0.254: v1(21.082,6.807) 22.809,6.807 26.977,10.975 v1(26.977,14.898)
LED_DRIVE: U2.M2 U5.B2 | length 17.3
  TOP w0.254: U5.B2 25.462,17.018 v1(26.416,17.018)
  POWER w0.254: v3(13.26,12.017) 16.256,12.017 21.257,17.018 v1(26.416,17.018)
LEVEL_SHIFT_nEN: R5.1 U2.A16 U4.8 | length 25.9
  TOP w0.254: U4.8 18.616,22.348 R5.1 21.446,22.194 v1(21.542,22.098)
  POWER w0.254: v3(16.51,8.517) 18.407,10.414 23.61,10.414 v1@24.3,11.104
  BOTTOM w0.254: v1(21.542,22.098) 23.114,22.098 24.3,20.912 v1@24.3,11.104
  other v1: 24.302,11.104
LIGHT_INT: R7.1 U2.A12 U7.4 | length 10.1
  TOP w0.152: U2.A12 16.804,9.517 17.129,9.193 19.431,9.193 21.004,7.62 v1(21.082,7.62) ; v1(21.25,9.058) v1@21.407,9.192 ; R7.1@22.98,9.058 R7.1
  TOP w0.254: v1(21.25,9.058) R7.1@22.98,9.058 ; R7.1@23.113,9.266 23.321,9.058 U7.4
  BOTTOM w0.254: v1(21.082,7.62) 21.082,8.89 v1(21.25,9.058)
NetC5_2: C5.2 J2.2 U1.B1 U1.B2 | length 7.4
  TOP w0.254: J2.2 2.048,21.904 1.524,22.428 1.524,25.654 2.32,26.45 C5.2 2.482,26.4 U1.B1 U1.B2
NetC6_2: C6.2 C7.2 L2.2 U2.B5 U2.E24 | length 10
  TOP w0.152: v3(16.01,11.267) 16.816,11.267 16.979,11.104 17.773,11.104 C6.2
  TOP w0.254: C6.2 C7.2 18.411,9.696 L2.2
  BOTTOM w0.152: v3(15.01,6.017) 16.01,7.017 v3(16.01,11.267)
NetC10_1: C10.1 U2.A23 X1.3 | length 2.4
  TOP w0.152: U2.A23 17.647,6.517 X1.3 17.87,6.504 C10.1
NetC11_2: C11.2 U2.C1 | length 1.7
  TOP w0.152: U2.C1 15.51,12.593 15.884,12.967 16.339,12.967 C11.2 ; C11.2@16.822,13.643 C11.2@16.828,13.643
NetC12_2: C12.2 U2.D2 X2.2 | length 3.9
  TOP w0.152: U2.D2 15.169,12.108 15.169,13.208 15.735,13.774 X2.2 15.735,14.176 16.357,14.798 C12.2 ; X2.2@15.763,14.014 15.763,14.093 X2.2@15.8,14.13
NetC13_1: C13.1 U2.B24 X1.1 | length 4.6
  TOP w0.152: U2.B24 17.022,6.017 17.318,5.721 18.143,5.721 X1.1 19.791,4.949 C13.1
NetC14_1: C14.1 U2.D23 | length 2
  TOP w0.254: U2.D23 15.546,6.231 15.546,5.316 C14.1
NetC15_2: C15.2 U2.F2 X2.1 | length 3.7
  TOP w0.152: C15.2 13.74,14.719 14.285,14.174 X2.1 14.285,13.774 14.888,13.171 14.888,12.108 14.851,12.108 U2.F2
NetC16_2: C16.2 L4.1 U2.H23 | length 3
  TOP w0.152: C16.2 14.26,5.07 14.351,5.07 14.351,6.426 U2.H23
  TOP w0.508: C16.2 14.06,3.748 ccw(c14.115,3.748) L4.1
NetC17_2: C17.2 L4.2 | length 30.8
  TOP w0.254: C17.2 18.45,0.75 21.288,0.75 21.288,3.694 23.345,3.694 23.345,0.75 25.327,0.75 25.327,3.719 27.282,3.719 27.282,0.75 29.162,0.75 29.162,3.714
  TOP w0.889: L4.2@14.082,2.642 ccw(c16.027,2.789) 16.027,0.838 C17.2@18.138,0.838
NetC18_2: C18.2 U2.N24 | length 1.5
  TOP w0.254: C18.2 12.737,5.161 13.01,5.434 U2.N24
NetC21_2: C21.2 U2.AC5 | length 2.6
  TOP w0.152: C21.2@10.064,13.643 10.064,12.445 10.351,12.158 10.351,11.426 U2.AC5
NetC31_2: C31.2 U6.B5 | length 0.9
  TOP w0.2: C31.2@11.347,17.755 U6.B5
  TOP w0.254: C31.2@11.118,17.526 C31.2@11.347,17.755
NetC37_2: C37.2 U8.10 | length 0.9
  TOP w0.254: U8.10 26.547,13.739 C37.2
NetD2_K: D2.K U6.D5 | length 14.4
  TOP w0.254: v4(10.668,18.745) v4(11.176,18.745) 11.729,18.745 U6.D5@11.913,18.561
  BOTTOM w0.254: v4(10.668,18.745) v4(11.176,18.745) 11.468,18.453 13.524,18.453 13.81,18.167 13.81,17.5 13.81,16.19 13.81,14.81 13.81,13.5 16.19,13.5 16.19,14.81 D2.K@16.19,16.19
NetD3_K: D3.K U6.D1 | length 20.9
  TOP w0.152: U6.D1 14.129,18.555 14.387,18.297 14.387,17.907 14.552,17.742 17.403,17.742 v1(17.892,18.231)
  BOTTOM w0.254: D3.K 11.112,15.922 10.113,15.922 8.89,17.145 8.89,19.329 9.906,20.345 14.986,20.345 17.101,18.231 v1(17.892,18.231)
NetD4_K: D4.K U6.C1 | length 6.4
  TOP w0.152: U6.C1 13.722,18.155 14.415,17.462 16.236,17.462 16.447,17.252 17.821,17.252 v1(17.892,17.323) v1@17.746,17.469
  BOTTOM w0.254: v1(17.892,17.323) 18.198,17.323 18.5,17.021 D4.K
NetJ4_1: J4.1 U4.9 | length 1.6
  TOP w0.254: J4.1 17.25,23.304 U4.9
NetJ4_2: J4.2 U4.10 | length 1.6
  TOP w0.254: J4.2 16.75,23.304 U4.10
NetJ4_3: J4.3 U4.11 | length 1.6
  TOP w0.254: J4.3 16.25,23.304 U4.11
NetJ4_4: J4.4 U4.12 | length 1.6
  TOP w0.254: J4.4 15.75,23.304 U4.12
NetJ4_5: J4.5 U4.13 | length 1.6
  TOP w0.254: J4.5 15.25,23.304 U4.13
NetJ5_1: J5.1 J5.2 U5.A2 | length 2
  TOP w0.254: J5.2 J5.1 24.75,18.23 U5.A2
NetL1_1: L1.1 U1.A4 | length 3.9
  TOP w0.254: U1.A4 4.864,27.355 5.971,28.462 L1.1
NetL2_1: L2.1 L3.2 | length 1.3
  TOP w0.254: L2.1 19.394,10.781 L3.2
NetL3_1: L3.1 U2.B3 | length 1.8
  TOP w0.254: U2.B3 17.754,11.767 L3.1
NetR8_2: R8.2 U8.7 | length 1.2
  TOP w0.254: U8.7 26.162,12.315 R8.2
NetR9_2: R9.2 U8.21 | length 0.9
  TOP w0.254: R9.2@22.46,13.679 22.52,13.739 U8.21
PMIC_INT: R1.1 U1.D2 U2.AC9 | length 29.3
  TOP w0.254: v1(9.398,23.622) 9.469,23.693 R1.1
  BOTTOM w0.254: v5(4.064,25.6) 4.572,25.092 7.928,25.092 v1(9.398,23.622) 8.89,23.114 3.81,23.114 3.556,22.86 3.556,21.082 4.572,20.066 5.334,20.066 10.51,14.89 v3(10.51,10.267)
PMIC_LSCTRL: U1.E3 U2.AC11 | length 19.2
  TOP w0.152: v1(3.556,24.13) 4.464,25.038 U1.E3
  BOTTOM w0.254: v1(3.556,24.13) 3.013,23.587 3.013,19.847 9.756,13.104 9.756,10.414 10.403,9.767 v3(10.51,9.767)
PMIC_nCD: U1.E2 U2.AD10 | length 21
  TOP w0.152: v1(2.54,24.13) 3.048,24.638 3.669,24.638 4.064,25.033 U1.E2 ; v1(5.683,12.838) 5.683,11.442 6.965,10.16 9.867,10.16 U2.AD10
  BOTTOM w0.254: v1(2.54,24.13) 2.54,19.558 5.683,16.415 v1(5.683,12.838)
QSPI_CLK: U2.AC15 U3.6 | length 7.5
  TOP w0.254: U3.6 v1(5.148,9.398)
  BOTTOM w0.254: v1(5.148,9.398) 5.175,9.398 5.937,10.16 7.743,10.16 9.136,8.767 v3(10.51,8.767)
QSPI_D0: U2.AD16 U3.5 | length 4
  TOP w0.152: U3.5 6.595,8.347 9.84,8.347 U2.AD16
  TOP w0.254: U3.5 U3.5@6.418,8.408
QSPI_D1: U2.AC19 U3.2 | length 10.7
  TOP w0.254: v1(3.878,1.27) U3.2
  BOTTOM w0.254: v1(3.878,1.27) 10.375,7.767 v3(10.51,7.767)
QSPI_D2: U2.AD18 U3.3 | length 12.7
  TOP w0.254: U3.3 5.148,1.405 5.461,1.092 6.799,1.092 7.112,1.405 7.112,7.521 7.608,8.017 U2.AD18
QSPI_D3: U2.AC17 U3.7 | length 8.3
  TOP w0.254: U3.7 v1(3.878,9.398)
  BOTTOM w0.254: v1(3.878,9.398) 5.009,8.267 v3(10.51,8.267)
QSPI_nCS: U2.AD12 U3.1 | length 18.2
  TOP w0.152: U3.1@2.449,2.789 1.884,2.789 1.092,3.581 1.092,9.931 1.88,10.719 5.08,10.719 5.932,9.867 9.299,9.867 9.649,9.517 U2.AD12
  TOP w0.254: U3.1@2.445,2.794 U3.1@2.449,2.789 ; U3.1@2.449,2.789 U3.1 U3.1@2.45,2.789
SCL: R3.1 U1.E5 U2.G1 U7.5 U8.23 | length 44.3
  TOP w0.254: v1(4.826,21.311) 4.877,21.361 4.877,24.181 5.264,24.568 U1.E5 ; U8.23 21.25,12.939 v1(20.828,12.517) 20.622,12.311 R3.1 20.622,8.614 20.828,8.408 U7.5
  BOTTOM w0.254: v1(4.826,21.311) 18.821,21.311 20.828,19.304 v1(20.828,12.517) v3(14.51,12.517)
SDA: R2.1 U1.E4 U2.J1 U7.6 U8.24 | length 46.3
  TOP w0.254: v1(4.318,22.327) 4.318,24.384 4.864,24.93 U1.E4 ; v1(21.844,7.758) 22.828,7.758 R2.1 24.098,7.727 U7.6 ; v1(21.844,11.7) 22.683,12.539 U8.24
  BOTTOM w0.254: v1(4.318,22.327) 19.329,22.327 21.844,19.812 v1(21.844,11.7) ; v3(14.01,12.517) 14.01,12.09 14.4,11.7 v1(21.844,11.7) ; v1(21.844,7.758) v1(21.844,11.7)
SPI_MISO: U2.N1 U6.A3 | length 5.1
  TOP w0.152: U6.A3@12.728,17.345 U6.A3 12.719,17.252 12.598,17.131 12.598,14.783 13.01,14.371 U2.N1
SPI_MOSI: U2.R1 U4.5 U6.A4 | length 18.7
  TOP w0.152: U6.A4 12.319,16.205 ; U2.R1 12.51,14.287 12.319,14.478 12.319,16.205 ; U4.5 16.756,20.083 16.383,19.71 10.107,19.71 9.423,19.027 9.423,17.17 10.389,16.205 12.319,16.205
SPI_nCS_DISP: U2.U1 U4.4 | length 16.7
  TOP w0.152: U2.U1 12.01,15.092 11.252,15.85 10.262,15.85 9.144,16.967 9.144,19.142 9.991,19.99 16.129,19.99 16.256,20.117 U4.4
SPI_nCS_HR: U2.T2 U6.A5 | length 6.6
  TOP w0.254: v4(11.76,12.017) U2.T2
  BOTTOM w0.254: v4(11.76,12.017) 12.752,13.009 12.752,16.522 v5(11.919,17.355)
SPI_SCLK: U2.L1 U4.6 U6.A2 | length 18.7
  TOP w0.152: U6.A2 13.119,17.252 12.878,17.011 12.878,16.18 ; U2.L1 13.51,14.411 12.878,15.043 12.878,16.18 ; U4.6@17.256,20.655 U4.6 19.046,20.898 19.791,20.153 19.791,17.018 18.953,16.18 12.878,16.18
SWCLK: J3.4 U2.AA24 | length 3
  TOP w0.152: J3.4 10.01,5.017 U2.AA24
SWDIO: J3.2 U2.AC24 | length 3.3
  TOP w0.152: J3.2 8.762,3.447 8.762,4.269 U2.AC24
SWDRST: J3.3 R4.1 U2.AC13 | length 11.2
  TOP w0.254: J3.3 10.064,2.101 R4.1 v4(11.312,1.092)
  BOTTOM w0.254: v3(10.51,9.267) 10.617,9.267 10.939,8.945 10.939,7.572 10.922,7.555 10.922,7.182 11.684,6.42 11.684,1.464 v4(11.312,1.092)
SWO: J3.6 U2.AD22 | length 4.1
  TOP w0.152: U2.AD22 v4(10.51,6.517)
  TOP w0.254: v4(10.76,4.401) 10.76,3.944 J3.6
  BOTTOM w0.254: v4(10.51,6.517) 10.76,6.267 v4(10.76,4.401)
USB_D_N: D1.3 J1.2 U2.AD4 | length 9.6
  TOP w0.254: J1.2@4.699,15.626 J1.2 5.28,15.65 5.537,15.392 7.315,15.392 8.189,14.519 D1.3 8.391,14.092 7.62,13.321 7.62,12.141 8.24,11.521 10.005,11.521 U2.AD4
USB_D_P: D1.2 J1.3 U2.AD6 | length 8.1
  TOP w0.254: J1.3 5.86,15 D1.2 6.341,14.092 7.112,13.321 7.112,11.931 8.029,11.013 10.007,11.013 U2.AD6
pads on no net: J1.4 J1.6@2,11.7 J1.6@2,18.3 J2.0 J4.MP1 J4.MP2 J5.S1 J5.S2 U1.D3 U1.D4 U1.E1 U2.A8 U2.A10 U2.A18 U2.A20 U2.AB2 U2.AC21 U2.B9 U2.B11 U2.B13 U2.B15 U2.B17 U2.B19 U2.H2 U2.J24 U2.K2 U2.L24 U2.P23 U2.R24 U2.T23 U2.U24 U2.V23 U2.W24 U2.Y23 U6.B1 U6.B3 U6.B4 U6.D4 U8.1 U8.2 U8.3 U8.4 U8.5 U8.6 U8.11 U8.14 U8.15 U8.16 U8.17 U8.19 U8.22

## Polygon pours and split planes (outlines as drawn)
+1V8 on POWER "+1V8_L02_P032" (solid, remove dead copper, pour order 32): 10.16,29.972 10.16,24.003 12.192,24.003 12.192,22.606 15.24,22.606 15.24,24.638 21.59,24.638 21.59,18.034 29.972,18.034 29.972,4.064 18.542,4.064 18.542,0 0,0 0,10.922 8.953,10.922 8.885,10.99 8.885,18.814 5.723,18.814 5.588,18.95 5.588,29.972
+3V3 on POWER "+3V3_L02_P030" (solid, pour order 30): 10.16,29.972 10.16,24.003 12.192,24.003 12.192,22.606 15.24,22.606 15.24,24.638 21.59,24.638 21.59,18.034 29.972,18.034 29.972,29.972
+VUSB on POWER "+VUSB_L02_P034" (solid, remove dead copper, pour order 34): 0,10.589 0,29.972 5.821,29.972 5.821,18.814 8.991,18.814 9.144,18.662 9.144,10.589
no net on POWER "NONET_L02_P010" (solid, pour order 10): 0,11.267
GND on TOP "GND_L01_P022" (solid, pour order 22): 0,0 0,29.972 30,29.972 29.972,29.944 29.972,4.318 18.45,4.318 18.45,0
GND on BOTTOM "GND_L04_P024" (solid, pour order 24): 0,0 0,29.972 29.972,29.972 30,29.944 30,4.401 18.542,4.401 18.542,0
GND on GND (split plane): 29.096,29.482 29.188,29.454 29.273,29.409 29.348,29.348 29.409,29.273 29.454,29.188 29.482,29.096 29.491,29.012 29.49,29 29.49,4.318 18.542,4.318 18.542,0.51 1,0.51 0.988,0.509 0.904,0.518 0.812,0.546 0.727,0.591 0.652,0.652 0.591,0.727 0.546,0.812 0.518,0.904 0.509,0.988 0.51,1 0.51,29 0.509,29.012 0.518,29.096 0.546,29.188 0.591,29.273 0.652,29.348 0.727,29.409 0.812,29.454 0.904,29.482 0.988,29.491 1,29.49 29,29.49 29.012,29.491

## Keep-outs
POWER:
  rectangle: 18.542,0 29.972,4.064
BOTTOM:
  rectangle: 18.542,0 30,4.064

## Other copper
BOTTOM:
  pour cut-out: 8.89,19.329 8.89,17.145 9.725,16.31 12.752,16.31 12.752,13.009 12.26,12.517 18.796,12.517 18.796,17.45 18.015,18.231 17.284,18.231 16.688,18.827 15.169,20.345 9.906,20.345
GND (plane layer: these items are gaps in the copper):
  rectangle: 18.542,0 29.972,4.318
  rectangle: 9.398,18.3 11.684,19.812

## Silkscreen, mask and mechanical layers (free items; w line width, h text height)
Top Overlay:
  drawing of 2 lines, arcs and shapes, not listed
  text "V3" at 26.717,23.534 h2
Mechanical 13:
  the board outline again, w0.254

## Text inside footprints (layer, text, board x,y; h text height)
J4: Top Overlay "10" at 12.4,26 h0.5 r180; Top Overlay "1" at 18.2,26 h0.5 r180